# Altium PCB PAN.PcbDoc
Units mm, origin at the board's own origin, x right, y up, seen from the top; angles counter-clockwise.
Board outline 101.6 x 106.5 mm, 2 copper layers (Top Layer, Bottom Layer); 124 components, 83 nets, 373 pads, 405 vias.
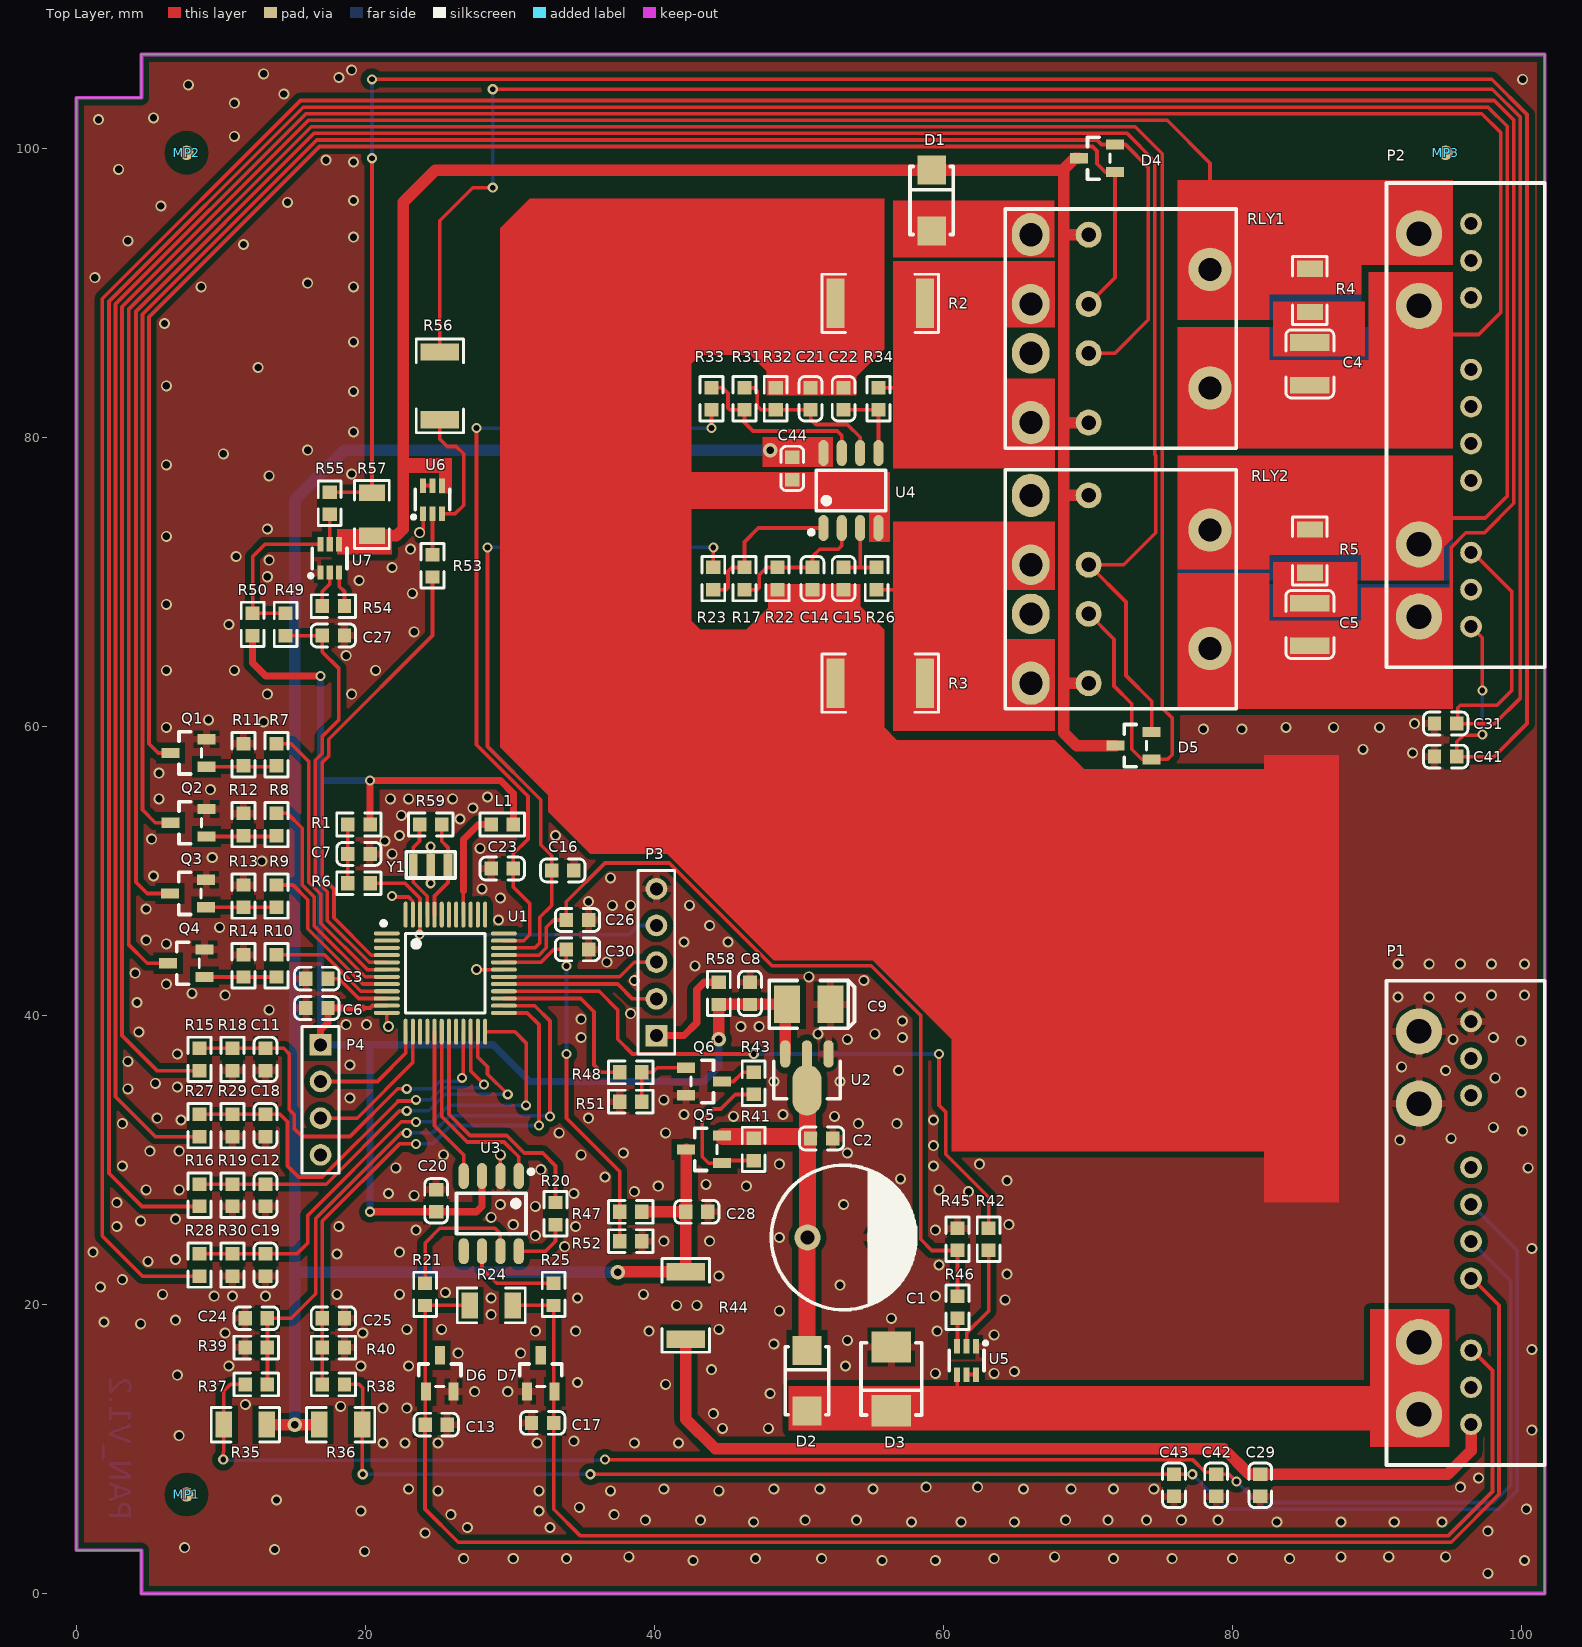
[diagram p0: Top Layer view]
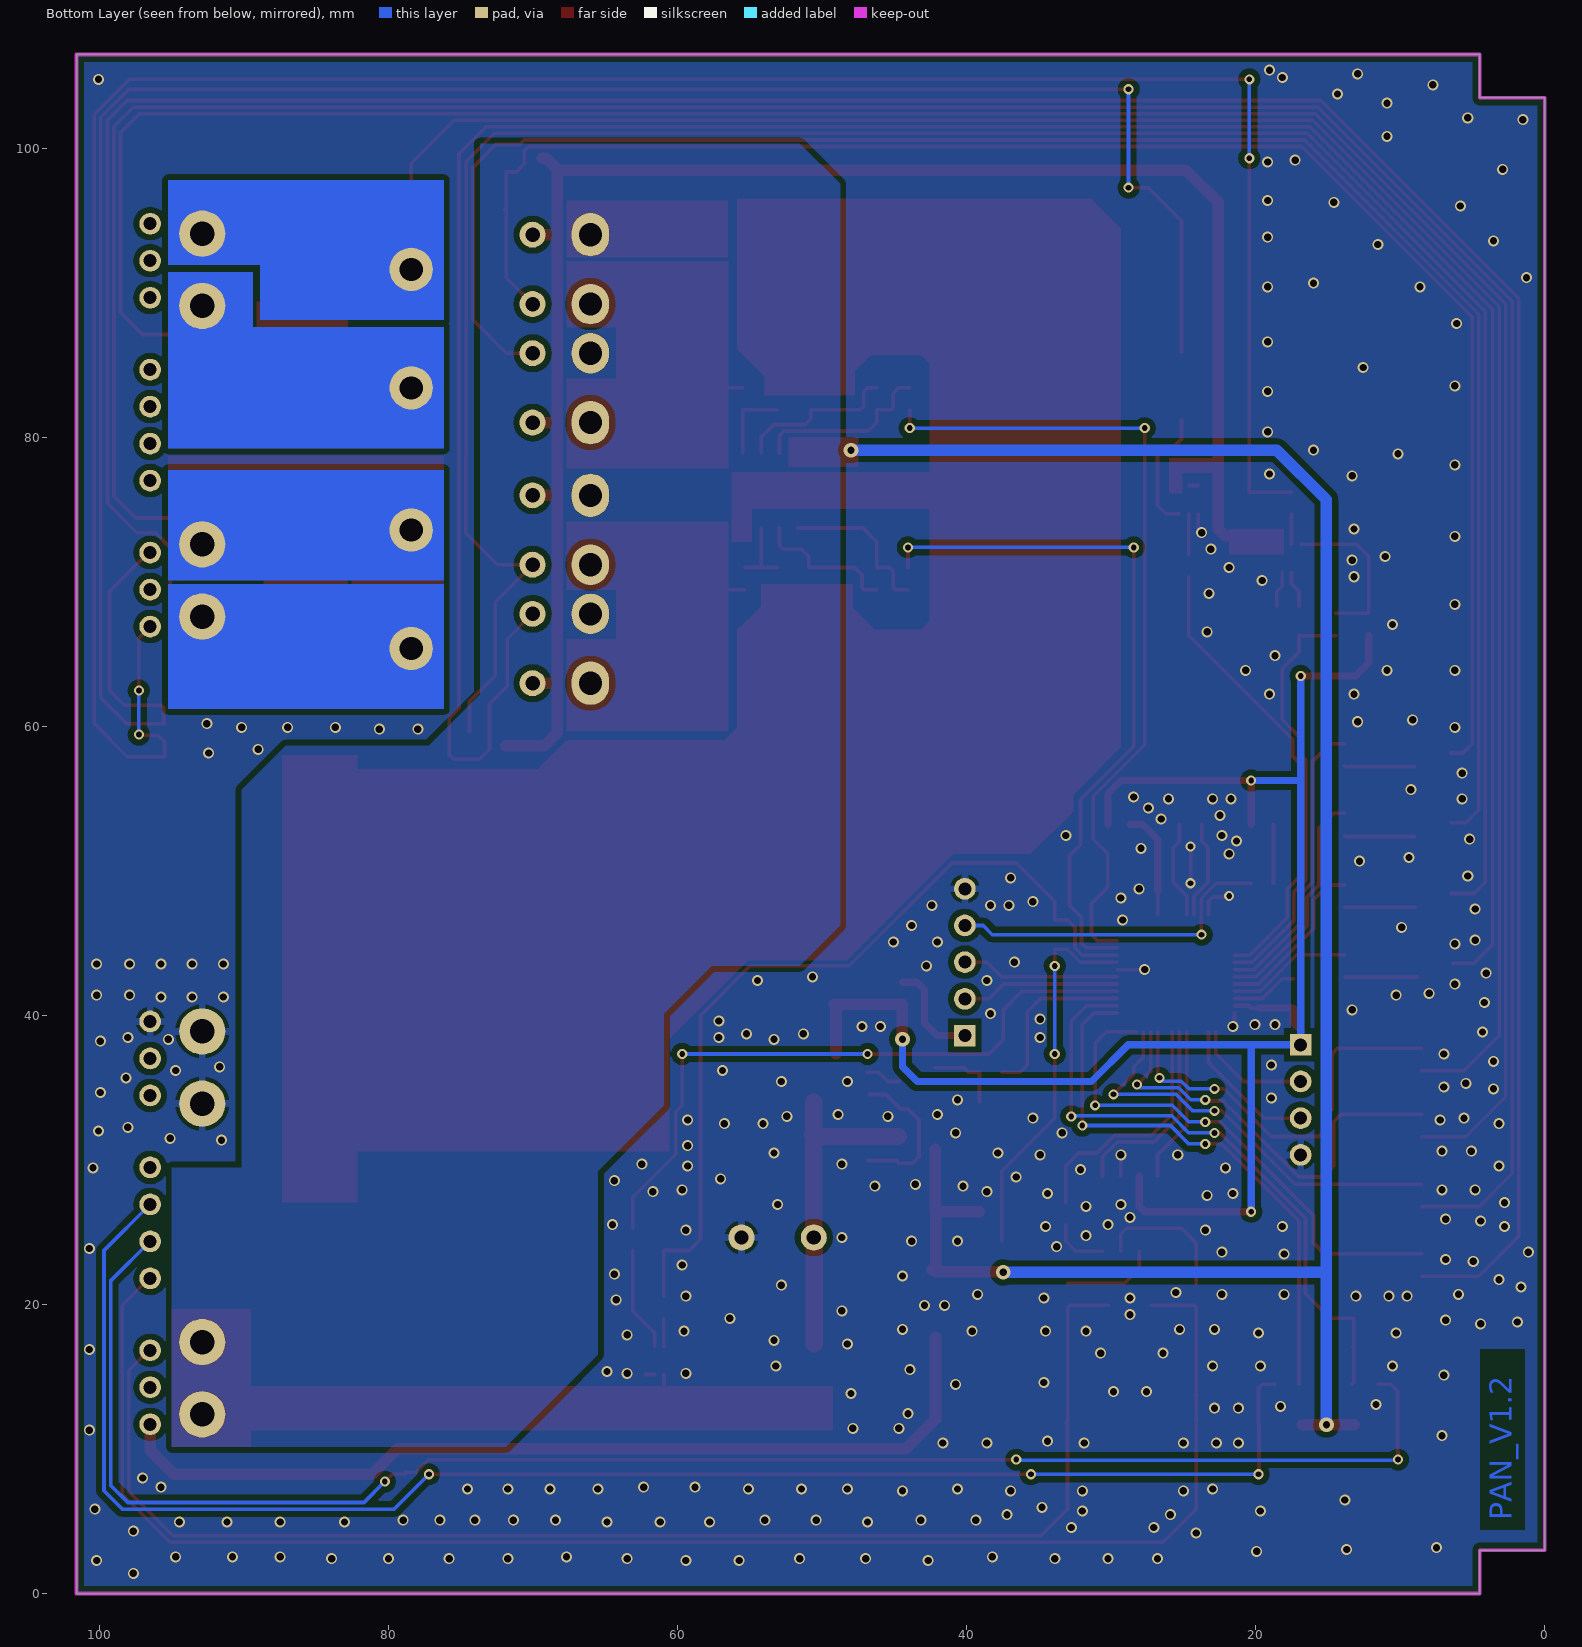
[diagram p1: Bottom Layer view, seen from below]
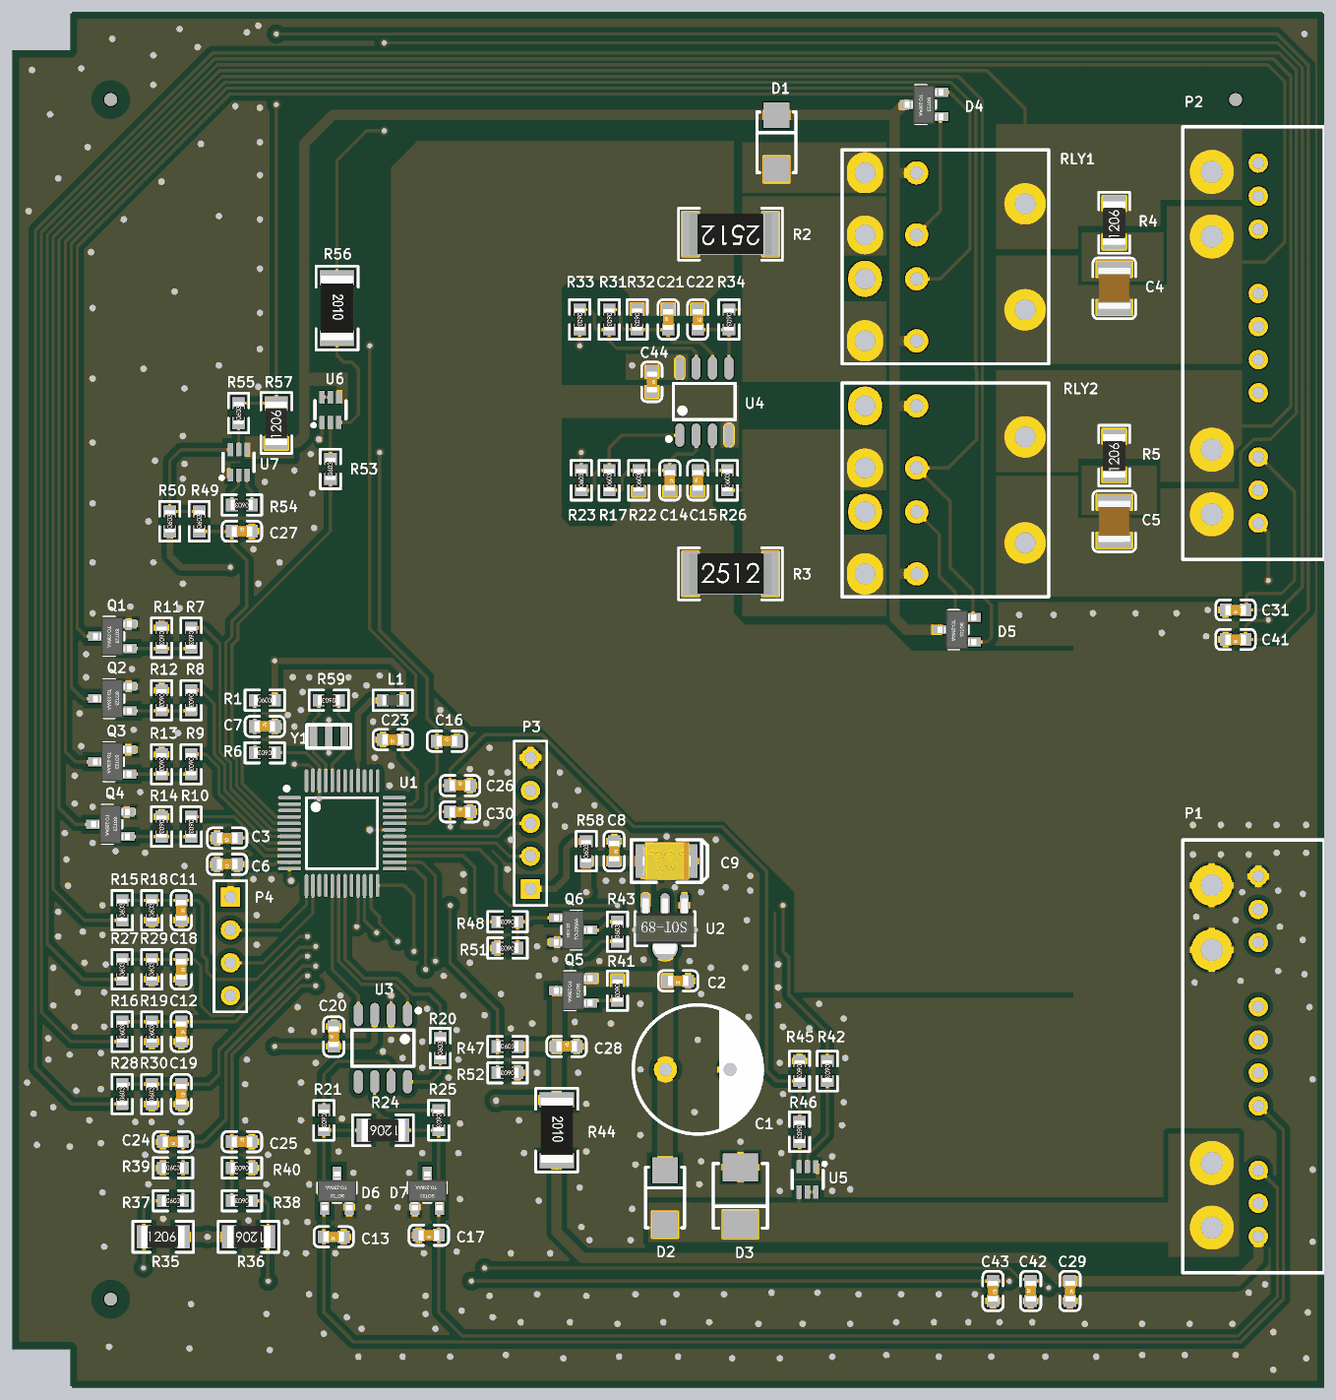
[diagram p2: 3D render of the assembled board from above, using the file's embedded part models]

## Layer stack, top to bottom
Top Layer: signal copper 0.0356
Dielectric: dielectric 0.32, FR-4, Dk 4.8
Bottom Layer: signal copper 0.0356

## Board outline
0,3 0,103.5 4.5,103.5 4.5,106.5 101.6,106.5 101.6,0 4.5,0 4.5,3

## Design rules (kind name [scope] priority, off if disabled: settings)
Clearance Clearance_polygon [InPolygon] p1: gap=0.4
Clearance [All] p2: gap=0.2
HoleSize [All] p1: absolutevalues=TRUE maxlimit=5.5 minlimit=0.4 maxpercent=80.000 minpercent=20.000
HoleToHoleClearance [All] p1: gap=0 allowstackedmicrovias=TRUE
MinimumSolderMaskSliver [All] p1: minsoldermaskwidth=0
PolygonConnect PolygonConnect_via [IsVia] p1: connectstyle=Direct reliefconductorwidth=0.254 reliefentries=4 polygonreliefangle="90 Angle" airgapwidth=0.254
PolygonConnect [InNet('GND')] p2: connectstyle=Relief reliefconductorwidth=0.508 reliefentries=4 polygonreliefangle="90 Angle" airgapwidth=0.254
RoutingVias [All] p1: holewidth=0.4 width=0.7 viastyle="Through Hole" minholewidth=0.4 minwidth=0.7 maxholewidth=3.25 maxwidth=5.25
SilkToSilkClearance [All] p1: silktosilkclearance=0
SilkToSolderMaskClearance [IsPad] p1: minsilkscreentomaskgap=0 clearancetoexposedcopper=TRUE
SolderMaskExpansion [All] p1: expansion=0.102
Width [All] p1: maxlimit=5 minlimit=0.2 preferedwidth=0.254
23 further rules are at their usual default settings.

## Classes and differential pairs
component class MOUDLAR: C1 C2 C4 C5 C8 C9 C11 C12 C13 C14 C15 C16 C17 C18 C19 C20 C21 C22 C23 C24 C25 C26 C27 C28 C29 C30 C31 C41 C42 C43 C44 D1 D2 D3 D4 D5 D6 D7 P1 P2 Q1 Q2 Q3 Q4 Q5 Q6 R2 R3 R4 R5 R7 R8 R9 R10 R11 R12 R13 R14 R15 R16 R17 R18 R19 R20 R21 R22 R23 R24 R25 R26 R27 R28 R29 R30 R31 R32 R33 R34 R35 R36 R37 R38 R39 R40 R41 R42 R43 R44 R45 R46 R47 R48 R49 R50 R51 R52 R53 R54 R55 R56 R57 RLY1 RLY2 U2 U3 U4 U5 U6 U7
component class MCU: C3 C6 C7 L1 MP1 MP2 MP3 P3 P4 R1 R6 R58 R59 U1 Y1

## Components (designator, comment, footprint, x,y, rotation, side; value= is the part's Value field where it differs from the comment)
C1 "220uF/35V" CAP10X12.5 53.086,24.638 r0 top
C2 "100nF" LC-0603_C 51.562,31.496 r180 top
C3 "10uF/10V" LC-0603_C 16.637,42.545 r180 top
C4 "100nF" LC-1210_C 85.344,85.09 r90 top
C5 "100nF" LC-1210_C 85.344,67.056 r90 top
C6 "100nF" LC-0603_C 16.637,40.513 r180 top
C7 "10uF/10V" LC-0603_C 19.55,51.181 r0 top
C8 "100nF" LC-0603_C 46.609,41.529 r270 top
C9 "10uF" LC-CASE-B_3528 50.673,40.767 r0 top
C11 "100nF" LC-0603_C 13.081,36.957 r270 top
C12 "100nF" LC-0603_C 13.081,27.559 r270 top
C13 "100pF" LC-0603_C 24.892,11.684 r180 top
C14 "100nF" LC-0603_C 50.927,70.231 r270 top
C15 "100nF" LC-0603_C 53.086,70.231 r90 top
C16 "100nF" LC-0603_C 33.655,50.038 r0 top
C17 "100pF" LC-0603_C 32.258,11.811 r180 top
C18 "100nF" LC-0603_C 13.081,32.385 r270 top
C19 "100nF" LC-0603_C 13.081,22.733 r270 top
C20 "100nF" LC-0603_C 24.892,27.178 r90 top
C21 "100nF" LC-0603_C 50.8,82.677 r90 top
C22 "100nF" LC-0603_C 53.086,82.677 r270 top
C23 "100nF" LC-0603_C 29.464,50.165 r180 top
C24 "100nF" LC-0603_C 12.446,19.05 r180 top
C25 "100nF" LC-0603_C 17.78,19.05 r0 top
C26 "100nF" LC-0603_C 34.671,46.609 r0 top
C27 "100nF" LC-0603_C 17.78,66.294 r0 top
C28 "100nF" LC-0603_C 42.926,26.416 r0 top
C29 "100nF" LC-0603_C 81.915,7.493 r270 top
C30 "100nF" LC-0603_C 34.671,44.577 r0 top
C31 "100nF" LC-0603_C 94.742,60.198 r180 top
C41 "100nF" LC-0603_C 94.742,57.912 r180 top
C42 "100pF" LC-0603_C 78.867,7.493 r90 top
C43 "100pF" LC-0603_C 75.946,7.493 r270 top
C44 "100nF" LC-0603_C 49.53,77.851 r270 top
D1 "SS24A" LC-SMA(DO-214AC)_S1 59.182,96.393 r270 top
D2 "SS24A" LC-SMA(DO-214AC)_S1 50.546,14.732 r270 top
D3 "SMBJ15CA" LC-SMB(DO-214AA)_S1 56.388,14.859 r90 top
D4 "BAV70" LC-SOT-23(SOT-23-3) 70.612,99.314 r0 top
D5 "BAV70" LC-SOT-23(SOT-23-3) 73.152,58.674 r0 top
D6 "MMBZ27VALT1G" LC-SOT-23(SOT-23-3) 25.146,15.24 r270 top
D7 "MMBZ27VALT1G" LC-SOT-23(SOT-23-3) 32.131,15.24 r270 top
L1 "BLM18PG181SN1D" LC-0603_L 29.464,53.213 r0 top
MP1 "MARK" MARK 7.62,6.858 r0 top
MP2 "MARK" MARK 7.62,99.695 r0 top
MP3 "MARK" MARK 94.742,99.695 r0 top
P1 "PedalConner" PADEL_CON 96.5,25.65 r0 top locked
P2 "PedalConner" PADEL_CON 96.5,80.85 r0 top locked
P3 "ICE" HDR1X5 40.132,38.608 r90 top
P4 "DEBUG" HDR1X4 16.891,37.973 r270 top
Q1 "BC817" LC-SOT-23(SOT-23-3) 7.747,58.165 r0 top
Q2 "BC817" LC-SOT-23(SOT-23-3) 7.747,53.339 r0 top
Q3 "BC817" LC-SOT-23(SOT-23-3) 7.728,48.443 r0 top
Q4 "BC817" LC-SOT-23(SOT-23-3) 7.601,43.617 r0 top
Q5 "BC807" LC-SOT-23(SOT-23-3) 43.434,30.734 r0 top
Q6 "BC817" LC-SOT-23(SOT-23-3) 43.434,35.433 r180 top
R1 "10K" LC-0603_R 19.55,53.213 r0 top
R2 "0.01Ω" LC-2512_R 55.626,89.281 r180 top
R3 "0.01Ω" LC-2512_R 55.626,62.992 r0 top
R4 "10Ω" LC-1206_R 85.344,90.17 r90 top
R5 "10Ω" LC-1206_R 85.344,72.136 r90 top
R6 "100R" LC-0603_R 19.55,49.149 r180 top
R7 "4.7K" LC-0603_R 13.843,58.039 r270 top
R8 "4.7K" LC-0603_R 13.843,53.213 r270 top
R9 "4.7K" LC-0603_R 13.843,48.26 r270 top
R10 "4.7K" LC-0603_R 13.843,43.434 r270 top
R11 "10K" LC-0603_R 11.557,58.039 r270 top
R12 "10K" LC-0603_R 11.557,53.213 r270 top
R13 "10K" LC-0603_R 11.557,48.26 r270 top
R14 "10K" LC-0603_R 11.557,43.434 r270 top
R15 "100K" LC-0603_R 8.509,36.957 r90 top
R16 "100K" LC-0603_R 8.509,27.559 r90 top
R17 "47K" LC-0603_R 46.228,70.231 r90 top
R18 "47K" LC-0603_R 10.795,36.957 r90 top
R19 "47K" LC-0603_R 10.795,27.559 r90 top
R20 "0" LC-0603_R 33.147,26.289 r90 top
R21 "0" LC-0603_R 24.13,20.701 r270 top
R22 "4.7K" LC-0603_R 48.514,70.231 r90 top
R23 "10K" LC-0603_R 44.069,70.231 r90 top
R24 "120Ω" LC-1206_R 28.702,19.939 r180 top
R25 "0" LC-0603_R 33.02,20.701 r270 top
R26 "2K" LC-0603_R 55.372,70.231 r90 top
R27 "100K" LC-0603_R 8.509,32.385 r90 top
R28 "100K" LC-0603_R 8.509,22.733 r90 top
R29 "47K" LC-0603_R 10.795,32.385 r90 top
R30 "47K" LC-0603_R 10.795,22.733 r90 top
R31 "47K" LC-0603_R 46.228,82.677 r270 top
R32 "4.7K" LC-0603_R 48.387,82.677 r270 top
R33 "10K" LC-0603_R 43.942,82.677 r270 top
R34 "2K" LC-0603_R 55.499,82.677 r270 top
R35 "1.2K" LC-1206_R 11.684,11.684 r0 top
R36 "1.2K" LC-1206_R 18.288,11.684 r180 top
R37 "47K" LC-0603_R 12.446,14.478 r0 top
R38 "47K" LC-0603_R 17.78,14.478 r180 top
R39 "33K" LC-0603_R 12.446,17.018 r0 top
R40 "33K" LC-0603_R 17.78,17.018 r180 top
R41 "10K" LC-0603_R 46.863,30.734 r270 top
R42 "10K" LC-0603_R 63.119,24.511 r270 top
R43 "10K" LC-0603_R 46.863,35.306 r90 top
R44 "100Ω" LC-2010_R 42.164,19.939 r270 top
R45 "10K" LC-0603_R 60.96,24.511 r270 top
R46 "33K" LC-0603_R 60.96,19.812 r270 top
R47 "47K" LC-0603_R 38.354,26.416 r0 top
R48 "10K" LC-0603_R 38.354,36.068 r180 top
R49 "47K" LC-0603_R 14.478,67.056 r90 top
R50 "10K" LC-0603_R 12.192,67.056 r90 top
R51 "10K" LC-0603_R 38.354,34.036 r180 top
R52 "33K" LC-0603_R 38.354,24.384 r180 top
R53 "10K" LC-0603_R 24.638,71.112 r90 top
R54 "10K" LC-0603_R 17.78,68.326 r180 top
R55 "10K" LC-0603_R 17.526,75.438 r90 top
R56 "100Ω" LC-2010_R 25.146,83.566 r270 top
R57 "1.2K" LC-1206_R 20.447,74.676 r90 top
R58 "NC" LC-0603_R 44.45,41.529 r90 top
R59 "1M" LC-0603_R 24.511,53.213 r180 top
RLY1 "JQC-16F-12VDC" HFKA 66.04,81.026 r0 top
RLY2 "JQC-16F-12VDC" HFKA 66.04,62.992 r0 top
U1 "NUC131LC2AE" LC-LQFP-48_7x7x05P 25.527,42.926 r270 top
U2 "HT7550-1" LC-SOT-89(SOT-89-3) 50.546,37.338 r90 top
U3 "TJA1042T" LC-SOIC-8_150mil 28.702,26.289 r180 top
U4 "LM2904DR" LC-SOIC-8_150mil 53.594,76.327 r0 top
U5 "PUMD3" LC-SOT-363 61.595,16.129 r90 top
U6 "PUMD3" LC-SOT-363 24.638,75.692 r270 top
U7 "PUMD3" LC-SOT-363 17.526,71.628 r270 top
Y1 "CSTCE12M0G15C99-R0" SMD_8M_3 24.511,50.419 r0 top

## Footprints (in the part's own frame and the unit in brackets; to place one, negate y for a bottom-side part, rotate by r counter-clockwise, add the part's x,y. Pads: shape width x height; smd on the part's side, far side on the other; paste and mask are expansions set on the pad)
CAP10X12.5 [mm]
  round 1.8 hole 1: 1(-2.5,0) 2(2.5,0)
  silkscreen extent -5,-5 5.08,5
HDR1X4 [mm] "Connector; Header; 4 Position"
  rect 1.5x1.5 hole 0.9: 1(0,0)
  round 1.5 hole 0.9: 2(2.54,0) 3(5.08,0) 4(7.62,0)
  silkscreen extent -1.27,-1.27 8.89,1.27
HDR1X5 [mm] "Connector; Header; 5 Position"
  rect 1.5x1.5 hole 0.9: 1(0,0)
  round 1.5 hole 0.9: 2(2.54,0) 3(5.08,0) 4(7.62,0) 5(10.16,0)
  silkscreen extent -1.27,-1.27 11.43,1.27
HFKA [mm]
  round 1.8 hole 1: 1(4,13) 2(4,8.2) 6(4,0) 7(4,4.8)
  oval 2.6x3 hole 1.6: 3(0,13) 9(0,0)
  oval 2.6x2.8 hole 1.6: 4(0,8.2) 8(0,4.8)
  round 3 hole 1.6: 5(12.4,10.6) 10(12.4,2.4)
  silkscreen extent -1.78,-1.78 14.22,14.78
LC-0603_C [mm]
  rect 0.93x0.98 smd: 1(-0.77,0) 2(0.77,0)
  silkscreen extent -1.54,-0.79 1.54,0.79, body extent -0.8,-0.4 0.8,0.4, height 0.3
LC-0603_L [mm]
  rect 0.93x0.98 smd: 1(-0.77,0) 2(0.77,0)
  silkscreen extent -1.53,-0.79 1.54,0.79, body extent -0.82,-0.41 0.83,0.41, height 0.46
LC-0603_R [mm]
  rect 0.93x0.98 smd: 1(-0.77,0) 2(0.77,0)
  silkscreen extent -1.53,-0.79 1.54,0.79, body extent -0.85,-0.4 0.85,0.4, height 0.56
LC-1206_R [mm]
  rect 1.13x1.8 smd: 1(-1.49,0) 2(1.49,0)
  silkscreen extent -2.35,-1.2 2.35,1.2, body extent -1.7,-0.86 1.65,0.87, height 0.85
LC-1210_C [mm]
  rect 1.16x2.72 smd: 1(-1.475,0) 2(1.475,0)
  silkscreen extent -2.36,-1.66 2.35,1.66, body extent -1.6,-1.25 1.6,1.25, height 1.3
LC-2010_R [mm]
  rect 1.2x2.67 smd: 1(-2.34,0) 2(2.34,0)
  silkscreen extent -3.24,-1.63 3.24,1.63, body extent -2.5,-1.25 2.5,1.25, height 0.6
LC-2512_R [mm]
  rect 1.25x3.42 smd: 1(-3.1,0) 2(3.1,0)
  silkscreen extent -4.02,-2.01 4.02,2.01, body extent -3.16,-1.6 3.16,1.6, height 0.62
LC-CASE-B_3528 [mm]
  rect 1.8x2.6 smd: 1(1.5,0) 2(-1.5,0)
  silkscreen extent -2.73,-1.65 3.16,1.65, body extent -1.85,-1.47 1.85,1.46, height 2.03
LC-LQFP-48_7x7x05P [mm]
  oval 0.28x1.8 smd mask+0.051: 1(-2.75,-4.05) 2(-2.25,-4.05) 3(-1.75,-4.05) 4(-1.25,-4.05) 5(-0.75,-4.05) 6(-0.25,-4.05) 7(0.25,-4.05) 8(0.75,-4.05) 9(1.25,-4.05) 10(1.75,-4.05) 11(2.25,-4.05) 12(2.75,-4.05) 25(2.75,4.05) 26(2.25,4.05) 27(1.75,4.05) 28(1.25,4.05) 29(0.75,4.05) 30(0.25,4.05) 31(-0.25,4.05) 32(-0.75,4.05) 33(-1.25,4.05) 34(-1.75,4.05) 35(-2.25,4.05) 36(-2.75,4.05)
  oval 1.8x0.28 smd mask+0.051: 13(4.05,-2.75) 14(4.05,-2.25) 15(4.05,-1.75) 16(4.05,-1.25) 17(4.05,-0.75) 18(4.05,-0.25) 19(4.05,0.25) 20(4.05,0.75) 21(4.05,1.25) 22(4.05,1.75) 23(4.05,2.25) 24(4.05,2.75) 37(-4.05,2.75) 38(-4.05,2.25) 39(-4.05,1.75) 40(-4.05,1.25) 41(-4.05,0.75) 42(-4.05,0.25) 43(-4.05,-0.25) 44(-4.05,-0.75) 45(-4.05,-1.25) 46(-4.05,-1.75) 47(-4.05,-2.25) 48(-4.05,-2.75)
  silkscreen extent -3.6,-4.42 2.75,2.75
LC-SMA(DO-214AC)_S1 [mm]
  rect 2x2 smd: 1(2.1,0) 2(-2.1,0)
  silkscreen extent -2.35,-1.5 2.35,1.5
LC-SMB(DO-214AA)_S1 [mm]
  rect 2.159x2.743 smd: 1(2.21,0) 2(-2.21,0)
  silkscreen extent -2.5,-2.1 2.5,2.1
LC-SOIC-8_150mil [mm]
  oval 0.7x1.8 smd: 1(-1.905,-2.6) 2(-0.635,-2.6) 3(0.635,-2.6) 4(1.905,-2.6) 5(1.905,2.6) 6(0.635,2.6) 7(-0.635,2.6) 8(-1.905,2.6)
  silkscreen extent -2.9,-3.05 2.4,1.4
LC-SOT-23(SOT-23-3) [mm]
  rect 1.25x0.7 smd: 1(1.25,-0.95) 2(1.25,0.95) 3(-1.25,0)
  silkscreen extent -0.65,-1.46 0.9,1.46, body extent -1.5,-1.5 1.5,1.5, height 1.3
LC-SOT-89(SOT-89-3) [mm]
  oval 1.9x0.7 smd: 1(0,-1.5) 3(0,1.5)
  oval 3.5x2 smd: 2(-2.5,0)
  oval 2.1x0.7 smd: 2(-0.1,0)
  silkscreen extent -3.1,-2.3 -0.5,2.3, body extent -3.75,-2.25 0.55,2.25, height 1.51
LC-SOT-363 [mm]
  rect 1x0.42 smd mask+0.051: 1(0.975,-0.65) 2(0.975,0) 3(0.975,0.65) 4(-0.975,0.65) 5(-0.975,0) 6(-0.975,-0.65)
  silkscreen extent -0.7,-1.43 1.32,1.2
MARK [mm]
  round 1 smd: MARK(0,0)
  Top Layer pour cut-out: 0,-1.5 -0.574,-1.386 -1.061,-1.061 -1.386,-0.574 -1.5,0 -1.5,0 -1.386,0.574 -1.061,1.061 -0.574,1.386 0,1.5 0,1.5 0.574,1.386 1.061,1.061 1.386,0.574 1.5,0 1.5,0 1.386,-0.574 1.061,-1.061 0.574,-1.386 0,-1.5
PADEL_CON [mm]
  round 3.2 hole 1.7: 1(-3.6,13.25) 2(-3.6,8.25) 3(-3.6,-8.25) 4(-3.6,-13.25)
  round 1.5 hole 0.9: 5(0,-13.935) 6(0,-11.375) 7(0,-8.815) 8(0,-3.84) 9(0,-1.28) 10(0,1.28) 11(0,3.84) 12(0,8.815) 13(0,11.375) 14(0,13.935)
  silkscreen extent -5.85,-16.75 5.11,16.75
SMD_8M_3 [mm]
  rect 0.6x1.5 smd: 1(-1.2,0) 2(1.2,0) 3(0,0)
  silkscreen extent -1.7,-0.9 1.7,0.9

## Part data
C1: library part "Cap Pol1", "Polarized Capacitor (Radial)"
C2 C3 C4 C5 C6 C7 C8 C9 C11 C12 C13 C14 C15 C16 C17 C18 C19 C20 C21 C22 C23 C24 C25 C26 C27 C28 C29 C30 C31 C41 C42 C43 C44: library part "0805 6pF (6R0) 0.25pF 50V", "贴片电容"
D1 D2: library part "SMA(DO-214AC) SS54", "二极管"
D3: library part "SMB/DO-214AA P6SMB6.8CA", "TVS"
D4 D5 D6 D7: library part "SOT-23 BAV70 A4", "开关二极管"
L1: library part Inductor, "Inductor"
P3: library part "Header 5", "Header, 5-Pin"
P4: library part "Header 4", "Header, 4-Pin"
Q1 Q2 Q3 Q4 Q6: library part "SOT-23 SS8050 Y1", "三极管"
Q5: library part "SOT-23 SS8550 Y2", "三极管"
R1 R2 R3 R4 R5 R6 R7 R8 R9 R10 R11 R12 R13 R14 R15 R16 R17 R18 R19 R20 R21 R22 R23 R24 R25 R26 R27 R28 R29 R30 R31 R32 R33 R34 R35 R36 R37 R38 R39 R40 R41 R42 R43 R44 R45 R46 R47 R48 R49 R50 R51 R52 R53 R54 R55 R56 R57 R58 R59: library part "0805 15KΩ (1502) 1%", "贴片电阻"
U2: library part "SOT-89 78L05G-AB3-R", "低压差线性稳压(LDO)"
U3: library part TJA1042
U4: library part LM2904DR2G, "运放"
Y1: library part CSTC

## Via types
v1: diameter 0.762, hole 0.508, Top Layer to Bottom Layer, tented both sides, 362 vias
v2: diameter 0.7, hole 0.4, Top Layer to Bottom Layer, tented both sides, 39 vias
v3: diameter 1.016, hole 0.508, Top Layer to Bottom Layer, tented both sides, 4 vias

## Nets (pads, with @x,y where several pads share a name; then routed paths per layer and width w, separated by ;. In a path a pad name is that pad's centre, name@x,y a point inside that pad or via, vN(x,y) a via of type N, cw(c..) or ccw(c..) an arc to the next point about the centre after c; other vN are vias at no path point)
ADC_L_OUT: C23.1 R33.2 U1.35 | length 56.9
  Top Layer w0.254: v2(27.686,80.645) 27.686,58.728 31.242,55.172 31.242,52.197 30.234,51.189 C23.1 30.234,48.887 31.369,47.752 31.369,45.593 30.952,45.176 U1.35 ; v2(43.942,80.645) R33.2
  Bottom Layer w0.254: v2(27.686,80.645) v2(43.942,80.645)
ADC_R_OUT: C16.1 R23.2 U1.34 | length 49.4
  Top Layer w0.254: v2(28.448,72.39) 28.448,58.608 32.131,54.925 32.131,51.816 32.885,51.062 C16.1 32.885,47.617 32.058,46.79 32.058,45.012 31.722,44.676 U1.34 ; R23.2 v2(44.069,72.39)
  Bottom Layer w0.254: v2(28.448,72.39) 43.942,72.39 44.069,72.517 v2(44.069,72.39)
AVDD5: L1.1 U1.40 | length 7.5
  Top Layer w0.254: U1.40 26.777,48.621
  Top Layer w0.5: 26.777,48.621 26.777,52.177 27.813,53.213 L1.1
CANH: C13.2 D6.1 P1.8 R21.2 R24.2 | length 109.5
  Top Layer w0.254: C13.2 24.122,5.85 26.416,3.556 95.123,3.556 98.436,6.869 98.436,19.953 P1.8@96.494,21.895 ; C13.2@24.13,11.81 D6.1@24.13,13.782 ; D6.1@24.196,13.716 D6.1@24.13,13.782 ; R24.2 24.258,19.939 24.13,19.811 D6.1@24.13,13.782
CANL: C17.1 D7.2 P1.7 R24.1 R25.2 | length 94.4
  Top Layer w0.254: R24.1 32.892,19.939 33.02,19.811 33.02,11.939 C17.1@33.148,11.811 ; C17.1 33.028,5.834 34.852,4.01 94.935,4.01 97.982,7.057 97.982,15.432 P1.7@96.494,16.92
CANRX: U1.17 U3.4 | length 10.8
  Top Layer w0.254: U1.17 24.777,32.373 26.797,30.353 U3.4
CANSTBY: R20.2 U1.19 | length 17.1
  Top Layer w0.254: U1.19 25.777,33.158 27.239,31.696 29.779,31.696 30.995,30.48 32.258,30.48 33.147,29.591 R20.2
CANTX: U1.18 U3.1 | length 13.7
  Top Layer w0.254: U1.18 25.277,33.016 27.051,31.242 29.591,31.242 30.607,30.226 U3.1
DVDD5: C6.1 C8.2 C9.2 C20.1 L1.2 P4.1 R1.2 R50.1 R58.1 U1.11 U2.3 U3.3 | length 121.4
  Top Layer w0.3: 19.812,40.513 20.32,40.513 20.483,40.676 U1.11 U1.11@21.467,40.666
  Top Layer w0.5: R50.1 12.192,64.389 13.081,63.5 v2(16.891,63.5) ; P4.1 16.891,38.989 17.407,39.505 C6.1 19.812,40.513 ; v2(20.32,26.416) 27.686,26.416 28.067,26.797 U3.3 ; R1.2 v2(20.32,56.261) 29.337,56.261 30.234,55.364 L1.2
  Top Layer w0.8: v3(44.45,38.354) R58.1 44.458,40.767 C9.2 49.046,40.64 U2.3
  Bottom Layer w0.5: v2(16.891,63.5) 16.891,56.261 ; v2(20.32,26.416) 20.32,37.973 ; v2(20.32,56.261) 16.891,56.261 ; v3(44.45,38.354) 44.45,36.449 43.434,35.433 31.369,35.433 28.829,37.973 20.32,37.973 ; 16.891,56.261 P4.1 20.32,37.973
GND: C1.2 C2.1 C3.2 C6.2 C7.2 C8.1 C9.1 C11.2 C12.2 C13.1 C14.2 C15.1 C16.2 C17.2 C18.2 C19.2 C20.2 C21.2 C22.1 C23.2 C24.2 C25.2 C26.2 C27.2 C28.2 C29.2 C30.2 C31.2 C41.2 C42.1 C43.2 C44.2 D3.1 D6.2 D7.1 P1.1 P1.2 P1.14 P3.5 P4.4 Q1.2 Q2.2 Q3.2 Q4.2 Q6.2 R2.2 R3.1 R11.1 R12.1 R13.1 R14.1 R18.1 R19.1 R22.1 R29.1 R30.1 R32.1 R39.1 R40.1 R45.1 R51.2 R52.1 U1.12 U1.31 U1.47 U2.1 U3.2 U4.4 U5.1 U6.1 U7.1 Y1.3 | length 11
  Top Layer w0.254: U1.12 21.477,39.356 v1(21.59,39.243) ; v2(21.844,48.26) 21.901,48.203 22.97,48.203 23.277,47.896 U1.47 ; v1@23.876,73.152 23.988,73.264 U6.1 ; v2(24.511,49.149) Y1.3 v2(24.511,51.689) ; v1(27.686,43.18) 27.69,43.176 U1.31 ; U3.2 v1(29.337,30.353)
  other v1: 97.663,1.397 42.672,2.286 55.753,2.286 59.436,2.286 100.203,2.286 26.797,2.413 30.226,2.413 33.909,2.413 46.99,2.413 51.562,2.413 63.5,2.413 71.755,2.413 75.819,2.413 80.01,2.413 83.947,2.413 38.227,2.54 67.691,2.54 87.503,2.54 90.805,2.54 94.742,2.54 19.939,2.921 13.716,3.048 7.493,3.175 24.13,4.191 97.663,4.318 27.051,4.572 32.766,4.572 46.863,4.953 57.785,4.953 61.214,4.953 64.897,4.953 83.058,4.953 87.503,4.953 91.186,4.953 94.488,4.953 39.37,5.08 43.18,5.08 50.419,5.08 53.975,5.08 68.453,5.08 71.374,5.08 74.041,5.08 76.454,5.08 78.994,5.08 25.908,5.461 37.211,5.461 19.685,5.715 32.004,5.715 100.33,5.842 34.798,5.969 13.843,6.477 25.019,7.112 32.004,7.112 36.957,7.112 44.45,7.112 22.987,7.239 40.64,7.239 48.26,7.239 51.435,7.239 55.118,7.239 65.532,7.239 68.834,7.239 71.755,7.239 74.549,7.239 58.801,7.366 62.357,7.366 95.758,7.366 97.028,8.001 21.209,10.414 22.733,10.414 25.019,10.414 31.877,10.414 38.608,10.414 41.656,10.414 34.417,10.541 7.112,10.922 100.711,11.303 44.704,11.43 47.879,11.43 44.069,12.446 21.209,12.827 22.86,12.827 18.288,12.954 11.684,13.081 48.006,13.843 27.559,13.97 29.845,13.97 40.767,14.478 34.671,14.605 6.985,15.113 59.436,15.24 63.5,15.24 64.897,15.367 43.942,15.494 10.541,15.748 19.685,15.748 22.987,15.748 53.213,15.748 26.416,16.637 30.734,16.637 100.711,16.891 48.26,17.272 53.34,17.526 63.5,17.907 10.287,18.034 19.812,18.034 31.75,18.161 34.544,18.161 39.624,18.161 59.563,18.161 22.86,18.288 25.273,18.288 44.45,18.288 4.445,18.669 1.905,18.796 6.858,18.923 56.388,19.05 28.702,19.304 48.641,19.558 41.529,19.939 42.926,19.939 64.262,20.32 28.702,20.447 34.671,20.447 9.525,20.574 10.795,20.574 13.081,20.574 59.436,20.574 5.969,20.701 18.034,20.701 22.352,20.701 39.243,20.701 25.527,20.828 1.651,21.209 52.832,21.336 3.175,21.717 44.45,21.971 64.389,22.098 59.69,22.733 4.953,22.987 6.858,23.114 18.034,23.495 1.143,23.622 22.352,23.622 100.711,23.876 33.782,24.003 40.64,24.384 43.815,24.384 48.641,24.638 31.75,24.765 23.495,25.146 59.436,25.146 2.794,25.4 18.161,25.4 34.544,25.4 30.226,25.527 64.516,25.527 4.445,25.781 6.858,25.908 28.702,26.035 31.75,26.797 29.337,26.924 53.086,26.924 2.794,27.051 23.368,27.559 21.59,27.686 34.417,27.686 38.608,27.813 61.722,27.813 4.826,27.94 7.112,27.94 59.69,27.94 40.259,28.194 46.355,28.194 43.561,28.321 64.389,28.575 57.023,28.702 36.576,28.829 32.131,29.337 22.098,29.464 100.457,29.464 3.175,29.591 59.309,29.591 48.641,29.718 62.484,29.718 25.4,30.353 34.925,30.353 37.846,30.48 53.34,30.48 5.08,30.607 7.112,30.607 59.309,30.988 91.567,31.369 95.123,31.496 33.401,31.877 40.767,31.877 100.076,32.004 98.044,32.258 3.175,32.512 54.102,32.512 56.769,32.512 7.239,32.766 59.309,32.766 5.588,32.893 35.433,32.893 45.466,33.02 52.451,33.02 42.037,33.147 48.895,33.147 40.64,34.163 18.923,34.29 99.949,34.671 3.556,34.925 6.985,35.052 5.461,35.306 48.26,35.433 52.832,35.433 98.171,35.687 56.896,36.195 94.742,36.195 91.694,36.449 18.923,36.576 3.556,36.83 6.985,37.338 99.949,38.227 53.34,38.354 95.25,38.354 34.925,38.481 57.15,38.481 98.044,38.481 51.308,38.735 55.245,38.735 4.318,38.862 45.974,39.243 47.244,39.243 18.669,39.37 20.066,39.37 57.15,39.624 34.925,39.751 38.354,40.132 13.335,40.386 4.191,40.894 91.44,41.275 93.599,41.275 95.758,41.275 10.287,41.402 97.917,41.402 100.203,41.402 8.001,41.529 6.223,42.164 38.608,42.418 54.483,42.418 50.673,42.672 4.064,42.926 42.799,43.434 91.44,43.561 93.599,43.561 95.758,43.561 97.917,43.561 100.203,43.561 36.703,43.688 6.223,44.958 42.037,45.085 45.085,45.085 4.826,45.212 9.906,46.101 43.815,46.228 29.21,46.609 4.826,47.371 37.084,47.625 38.354,47.625 42.418,47.625 35.433,47.879 29.337,48.133 28.067,48.768 36.957,49.53 5.334,49.657 12.827,50.673 9.398,50.927 21.844,51.181 27.94,51.562 21.336,52.07 5.207,52.197 22.352,52.451 33.147,52.451 26.543,53.594 22.479,53.848 27.432,54.356 5.715,54.991 21.717,54.991 22.987,54.991 26.035,54.991 28.448,55.118 9.271,55.626 5.715,56.769 92.456,58.166 89.027,58.42 77.978,59.817 80.645,59.817 6.223,59.944 83.693,59.944 86.995,59.944 90.17,59.944 92.583,60.198 12.954,60.325 9.144,60.452 13.208,62.23 19.05,62.23 6.223,63.881 10.922,63.881 20.701,63.881 18.669,64.897 23.368,66.548 10.541,67.056 6.223,68.453 23.241,69.215 19.558,70.104 13.208,70.358 21.844,70.993 13.335,71.501 11.049,71.755 23.114,72.263 6.223,73.152 23.749,73.406 13.208,73.66 13.335,77.343 19.05,77.47 6.223,78.105 10.16,78.867 16.002,79.121 19.177,80.391 19.177,83.185 6.223,83.566 12.573,84.836 19.177,86.614 6.096,87.884 8.636,90.424 19.177,90.424 16.002,90.678 1.27,91.059 11.557,93.345 3.556,93.599 19.177,93.853 5.842,96.012 14.605,96.266 19.177,96.393 2.921,98.552 19.177,99.06 17.272,99.187 10.922,100.838 1.524,101.981 5.334,102.108 10.922,103.124 14.351,103.759 7.747,104.394 100.076,104.775 18.161,104.902 12.954,105.156 19.05,105.41
ICSPCLK: P3.3 U1.30 | length 11
  Top Layer w0.254: U1.30 37.592,42.676 38.604,43.688 P3.3
ICSPDAT: P3.2 U1.29 | length 11
  Top Layer w0.254: U1.29 37.453,42.176 38.481,41.148 P3.2
KT_L_H: R2.1 R34.1 RLY1.4 RLY1.9 | length 2.6
  Top Layer w0.254: R34.1 57.904,83.447 58.039,83.312
KT_R_H: R3.2 R26.1 RLY2.4 RLY2.9 | length 2.3
  Top Layer w0.254: R26.1 57.539,69.461 57.658,69.342
LIN1: C27.1 R49.1 U1.5 | length 29.1
  Top Layer w0.254: R49.1 17.002,66.286 C27.1 17.01,65.159 18.161,64.008 18.161,60.459 17.01,59.308 17.01,58.135 16.533,57.658 16.533,49.402 17.364,48.57 17.364,46.574 20.262,43.676 U1.5
LIN1_IN: C41.1 P2.5 R55.2 R57.2 | length 171.2
  Top Layer w0.254: R55.2 R57.2@20.447,76.208 ; R57.2 R57.2@20.447,76.208 ; v2(20.447,99.314) R57.2@20.447,76.208 ; v2(20.447,104.775) 97.931,104.775 100.368,102.338 100.368,60.198 98.082,57.912 C41.1 95.512,58.936 95.957,59.381 97.227,59.381 v2(97.282,59.436) ; P2.5 97.282,66.133 v2(97.282,62.484)
  Bottom Layer w0.254: v2(20.447,99.314) v2(20.447,104.775) ; v2(97.282,59.436) v2(97.282,62.484)
LIN2: R53.1 U1.4 | length 31.8
  Top Layer w0.254: U1.4 20.404,44.176 17.818,46.762 17.818,48.758 17.018,49.558 17.018,57.501 17.464,57.947 17.464,59.12 24.638,66.294 R53.1
LIN2_IN: C31.1 P2.7 R56.1 | length 154
  Top Layer w0.254: R56.1 25.146,94.996 27.432,97.282 v2(28.804,97.282) 28.854,97.282 v2@28.829,97.257 ; v2(28.804,104.089) 97.975,104.089 99.914,102.15 99.914,61.976 98.136,60.198 C31.1 95.577,60.263 95.577,61.287 95.758,61.468 98.298,61.468 99.314,62.484 99.314,69.342 96.621,72.035 P2.7
  Bottom Layer w0.254: v2(28.804,97.282) v2(28.804,104.089)
MOTOR_L_C1: P2.1 R4.2 R15.1 RLY1.5 | length 146
  Top Layer w0.254: R15.1@8.501,36.195 R15.1 5.577,36.187 3.156,38.608 3.156,89.036 16.066,101.946 75.473,101.946 78.44,98.979 RLY1.5
MOTOR_L_C2: C4.1 P2.2 R27.1 RLY1.10 | length 181
  Top Layer w0.254: R27.1 5.469,31.615 2.702,34.382 2.702,89.224 15.878,102.4 97.244,102.4 98.552,101.092 98.552,88.646 97.028,87.122 94.234,87.122
MOTOR_R_C1: P2.3 R5.2 R16.1 RLY2.5 | length 200.9
  Top Layer w0.254: R16.1 4.542,26.789 2.248,29.083 2.248,89.412 15.69,102.854 97.679,102.854 99.006,101.527 99.006,75.946 97.482,74.422 94.742,74.422
MOTOR_R_C2: C5.1 P2.4 R28.1 RLY2.10 | length 211.8
  Top Layer w0.254: R28.1 4.58,21.963 1.794,24.749 1.794,89.6 15.502,103.308 98.114,103.308 99.46,101.962 99.46,75.438 97.428,73.406 96.139,73.406 95.123,72.39 95.123,69.342
NetC4_2: C4.2 R4.1
NetC5_2: C5.2 R5.1
NetC7_1: C7.1 R1.1 R6.2 | length 4.1
  Top Layer w0.254: R6.2 R1.1
NetC14_1: C14.1 R17.1 R22.2 U4.2 | length 10.2
  Top Layer w0.254: R17.1 47.109,69.461 47.244,69.596 47.244,70.485 47.76,71.001 R22.2 C14.1 50.927,71.755 51.435,72.263 52.705,72.263 52.959,72.517 U4.2
NetC15_2: C15.2 R26.2 U4.3 | length 5
  Top Layer w0.254: C15.2 54.229,71.001 ; U4.3 54.229,71.001 ; R26.2 54.229,71.001
NetC21_1: C21.1 R31.1 R32.2 U4.6 | length 11.5
  Top Layer w0.254: R31.1 46.855,83.447 47.117,83.185 47.117,82.169 47.371,81.915 48.379,81.915 R32.2 C21.1 50.8,81.28 51.181,80.899 53.34,80.899 54.229,80.01 U4.6
NetC22_2: C22.2 R34.2 U4.5 | length 5.4
  Top Layer w0.254: C22.2 R34.2 U4.5
NetP3_1: P3.1 R58.2 | length 7.2
  Top Layer w0.5: P3.1 42.037,38.608 42.926,39.497 42.926,41.783 43.442,42.299 R58.2
NetQ1_1: Q1.1 R7.2 R11.2 | length 4.9
  Top Layer w0.254: Q1.1 13.789,57.215 R7.2
NetQ2_1: Q2.1 R8.2 R12.2 | length 4.9
  Top Layer w0.254: Q2.1 13.789,52.389 R8.2
NetQ3_1: Q3.1 R9.2 R13.2 | length 4.9
  Top Layer w0.254: Q3.1 13.84,47.493 R9.2
NetQ4_1: Q4.1 R10.2 R14.2 | length 5
  Top Layer w0.254: Q4.1 13.84,42.667 R10.2
NetQ5_1: Q5.1 R41.2 R43.1 | length 10.5
  Top Layer w0.254: R43.1@46.736,34.536 45.585,34.536 44.577,33.528 44.069,33.528 43.307,32.766 43.307,30.226 43.749,29.784 Q5.1 44.864,29.964 R41.2
NetQ6_1: Q6.1 R48.1 R51.1 | length 5.2
  Top Layer w0.254: R51.1 R48.1 39.878,36.068 40.195,36.386 40.198,36.383 Q6.1
NetQ6_3: Q6.3 R43.2 | length 2.4
  Top Layer w0.254: Q6.3 45.466,35.433 46.109,36.076 R43.2
NetR17_2: R17.2 R23.1 U4.1 | length 11.1
  Top Layer w0.254: R23.1 44.95,69.461 45.085,69.596 45.085,70.739 45.347,71.001 R17.2 46.228,72.771 47.184,73.727 U4.1
NetR20_1: R20.1 U3.8 | length 4
  Top Layer w0.254: U3.8 32.452,23.689 33.147,24.384 R20.1
NetR21_1: R21.1 U3.7 | length 9.8
  Top Layer w0.254: R21.1 24.13,24.257 25.146,25.273 28.956,25.273 29.337,24.892 U3.7
NetR25_1: R25.1 U3.6 | length 6.6
  Top Layer w0.254: U3.6 28.067,22.479 29.075,21.471 R25.1
NetR31_2: R31.2 R33.1 U4.7 | length 12.7
  Top Layer w0.254: R33.1 44.696,83.447 45.085,83.058 45.085,82.042 45.22,81.907 R31.2 46.228,81.026 46.809,80.445 52.651,80.445 52.959,80.137 U4.7
NetR42_2: R42.2 U5.2 | length 7.3
  Top Layer w0.254: U5.2 61.595,18.034 63.119,19.558 R42.2
NetR46_2: R46.2 U5.3 | length 1.9
  Top Layer w0.254: U5.3 60.96,17.119 R46.2
NetR49_2: R49.2 R50.2 U7.6 | length 11.3
  Top Layer w0.254: R49.2 R50.2 12.192,71.755 13.04,72.603 U7.6
NetR53_2: R53.2 U6.2 | length 2.8
  Top Layer w0.254: R53.2 U6.2
NetR54_1: R54.1 U7.3 | length 2.5
  Top Layer w0.254: U7.3 18.176,69.708 18.55,69.334 R54.1
NetR54_2: R54.2 U7.2 | length 2.5
  Top Layer w0.254: R54.2 17.01,69.334 17.526,69.85 U7.2
NetR55_1: R55.1 U7.5 | length 2.1
  Top Layer w0.254: U7.5 R55.1
NetR56_2: R56.2 U6.3 | length 8.7
  Top Layer w0.254: R56.2 25.146,79.883 25.654,79.375 26.289,79.375 26.797,78.867 26.797,75.311 26.203,74.717 U6.3
NetU5_5: U5.5 U5.6 | length 0.6
  Top Layer w0.254: U5.5 U5.6
NetU6_5: U6.5 U6.6 | length 0.6
  Top Layer w0.254: U6.6 U6.5
OSC_IN: R59.2 U1.45 Y1.1 | length 6.8
  Top Layer w0.254: R59.2 23.741,52.062 23.311,51.632 Y1.1 23.311,49.213 24.277,48.247 U1.45
OSC_OUT: R59.1 U1.44 Y1.2 | length 6.8
  Top Layer w0.254: U1.44 24.777,48.272 25.711,49.206 Y1.2 25.711,51.632 25.281,52.062 R59.1
PUL1: C42.2 P1.9 R35.1 R37.1 | length 115.1
  Top Layer w0.254: v2(10.16,9.271) 10.16,9.779 10.194,9.813 R35.1 10.194,14.004 10.668,14.478 R37.1@11.556,14.478 ; v2(36.576,9.271) 77.224,9.271 78.105,8.39 C42.2@78.867,8.39 ; C42.2 79.748,8.263 v2(80.264,7.747)
  Bottom Layer w0.254: v2(10.16,9.271) 10.202,9.229 36.534,9.229 v2(36.576,9.271) ; v2(80.264,7.747) 81.715,6.296 98.044,6.296 99.241,7.493 99.241,21.629 P1.9
PUL1_SEN: C24.1 R37.2 R39.2 U1.26 | length 43.2
  Top Layer w0.254: R39.2 13.216,14.598 R37.2@13.336,14.478 ; R39.2@13.276,17.078 13.216,17.138 C24.1 14.859,19.05 16.556,20.747 16.556,25.961 22.472,31.877 v2(22.86,31.877) ; U1.26 31.714,40.676 32.766,39.624 v2(32.766,33.02)
  Bottom Layer w0.254: v2(22.86,31.877) 24.638,31.877 25.823,33.062 32.724,33.062 v2(32.766,33.02)
PUL2: C43.1 P1.10 R36.1 R38.1 | length 109.8
  Top Layer w0.254: R38.1@18.67,14.478 19.558,14.478 19.812,14.224 19.812,11.718 R36.1 19.778,8.289 v2(19.812,8.255) ; v2(35.56,8.255) 75.938,8.255 C43.1 77.208,8.263 v2(77.216,8.255)
  Bottom Layer w0.254: v2(19.812,8.255) v2(35.56,8.255) ; v2(77.216,8.255) 79.629,5.842 98.425,5.842 99.695,7.112 99.695,23.735 P1.10
PUL2_SEN: C25.1 R38.2 R40.2 U1.25 | length 38.8
  Top Layer w0.254: R38.2 R40.2 17.01,25.773 22.352,31.115 v2(23.495,31.115) ; U1.25 31.198,40.176 32.004,39.37 v2(32.004,32.385)
  Bottom Layer w0.254: v2(23.495,31.115) 24.638,31.115 25.908,32.385 v2(32.004,32.385)
RELAY_L_1B: D4.1 Q1.3 RLY1.2 | length 114.3
  Top Layer w0.254: Q1.3 5.662,58.165 5.026,58.801 5.026,88.338 16.818,100.13 70.304,100.13 70.612,99.822 70.612,98.933 71.181,98.364 D4.1 71.862,95.905 ; RLY1.2 71.862,91.048 71.862,95.905 ; 72.009,95.758 71.862,95.905
RELAY_L_2B: D4.2 Q2.3 RLY1.7 | length 127.6
  Top Layer w0.254: Q2.3 5.462,53.339 4.572,54.229 4.572,88.526 16.63,100.584 70.612,100.584 70.932,100.264 D4.2 72.583,100.264 74.168,98.679 74.168,88.138 71.856,85.826 RLY1.7
RELAY_L_C1: R7.1 U1.6 | length 20.2
  Top Layer w0.254: R7.1 14.851,58.809 16.079,57.581 16.079,49.214 16.91,48.382 16.91,46.386 20.12,43.176 U1.6
RELAY_L_C2: R8.1 U1.7 | length 15.8
  Top Layer w0.254: R8.1 14.601,53.983 15.625,52.959 15.625,49.026 16.456,48.194 16.456,46.198 19.978,42.676 U1.7
RELAY_L_SENSE_C1: C11.1 R15.2 R18.2 U1.21 | length 28.4
  Top Layer w0.254: R15.2 R18.2 C11.1 14.343,37.727 14.732,37.338 14.732,33.493 15.063,33.162 15.063,32.181 15.621,31.623 18.923,31.623 22.225,34.925 v2(22.86,34.925) ; v2(26.67,35.687) 26.777,35.794 U1.21
  Bottom Layer w0.254: v2(22.86,34.925) 24.624,34.925 25.151,35.452 26.435,35.452 v2(26.67,35.687)
RELAY_L_SENSE_C2: C18.1 R27.2 R29.2 U1.22 | length 30
  Top Layer w0.254: R27.2 R29.2 C18.1 14.097,33.155 14.609,32.643 14.605,32.639 14.605,29.591 15.367,28.829 17.017,28.829 22.225,34.037 22.225,34.078 23.41,34.078 v2(23.495,34.163) ; U1.22 27.277,36.155 v2(28.211,35.221)
  Bottom Layer w0.254: v2(23.495,34.163) 24.504,34.163 25.339,34.998 27.988,34.998 v2(28.211,35.221)
RELAY_R_1B: D5.2 Q3.3 RLY2.2 | length 163.2
  Top Layer w0.254: Q3.3 4.897,48.443 4.118,49.222 4.118,88.714 16.442,101.038 72.698,101.038 74.622,99.114 74.622,78.794 74.676,78.74 74.676,73.406 72.462,71.192 RLY2.2 72.624,68.608 72.624,63.52 74.402,61.742 D5.2
RELAY_R_2B: D5.1 Q4.3 RLY2.7 | length 180.4
  Top Layer w0.254: Q4.3 4.897,43.617 3.61,44.904 3.61,88.848 16.254,101.492 73.26,101.492 75.13,99.622 75.13,61.268 75.819,60.579 75.819,58.039 75.504,57.724 D5.1 73.721,57.724 73.025,58.42 73.025,61.568 71.792,62.801 71.792,66.04 RLY2.7
RELAY_R_C1: R9.1 U1.8 | length 11.7
  Top Layer w0.254: R9.1 14.978,49.03 16.002,48.006 16.002,46.009 19.05,42.961 19.05,42.94 19.814,42.176 U1.8
RELAY_R_C2: R10.1 U1.9 | length 8.7
  Top Layer w0.254: R10.1 17.165,44.204 18.199,43.17 18.199,43.149 19.672,41.676 U1.9
RELAY_R_SENSE_C1: C12.1 R16.2 R19.2 U1.23 | length 29.1
  Top Layer w0.254: R16.2 R19.2 C12.1 17.28,28.329 22.352,33.401 v2(22.86,33.401) ; U1.23 27.777,37.12 28.448,36.449 28.448,35.941 v2(29.845,34.544)
  Bottom Layer w0.254: v2(22.86,33.401) 24.384,33.401 25.527,34.544 v2(29.845,34.544)
RELAY_R_SENSE_C2: C19.1 R28.2 R30.2 U1.24 | length 35.5
  Top Layer w0.254: R28.2 R30.2 C19.1 15.248,23.503 16.002,24.257 16.002,26.162 22.479,32.639 v2(23.495,32.639) ; U1.24 30.339,38.876 31.115,38.1 v2(31.115,33.782)
  Bottom Layer w0.254: v2(23.495,32.639) 24.638,32.639 25.781,33.782 v2(31.115,33.782)
RESET: P3.4 R6.1 U1.46 | length 23.1
  Top Layer w0.254: R6.1 22.733,49.149 23.777,48.105 U1.46 23.777,45.621 v2(23.749,45.593)
  Bottom Layer w0.254: v2(23.749,45.593) 38.227,45.593 38.862,46.228 P3.4
RX0: P4.2 U1.13 | length 8.2
  Top Layer w0.254: P4.2 20.828,35.433 22.777,37.382 U1.13
TX0: P4.3 U1.14 | length 10.1
  Top Layer w0.254: P4.3 19.431,32.893 23.277,36.739 U1.14
VBAT: D1.1 D2.1 D3.2 P1.3 P1.4 RLY1.3 RLY1.8 RLY2.3 RLY2.8 U5.4 | length 1.7
  Top Layer w0.254: U5.4 60.945,13.477 60.96,13.462
VBAT_SEN: C26.1 R45.2 R46.1 U1.33 | length 58.9
  Top Layer w0.254: U1.33 32.004,44.176 32.512,44.684 32.512,46.101 33.02,46.609 C26.1 33.901,47.871 36.576,50.546 41.021,50.546 48.133,43.434 54.991,43.434 58.42,40.005 58.42,24.511 59.19,23.741 R45.2 R46.1
VBAT_SEN_EN: R42.1 U1.28 | length 46.6
  Top Layer w0.254: U1.28 36.175,41.676 37.465,40.386 37.465,38.354 38.481,37.338 v2(46.863,37.338) ; v2(59.69,37.338) 59.69,33.782 60.144,33.328 60.144,30.407 63.119,27.432 R42.1
  Bottom Layer w0.254: v2(46.863,37.338) v2(59.69,37.338)
VCAP: C3.1 U1.10 | length 4.6
  Top Layer w0.254: C3.1 18.161,42.545 19.53,41.176 U1.10
VHALL: C29.1 P1.5 R44.2 | length 64.1
  Top Layer w0.8: R44.2@42.164,17.726 R44.2 42.164,12.065 44.196,10.033 79.375,10.033 81.145,8.263 C29.1 94.877,8.263 96.5,9.886 P1.5
VHALL_SEN: C30.1 R47.1 R52.2 U1.32 | length 26.4
  Top Layer w0.254: U1.32 32.146,43.676 33.047,44.577 C30.1 33.901,43.442 v2(33.909,43.434) ; v2(33.909,37.338) 33.909,32.893 37.584,29.218 R47.1 R52.2
  Bottom Layer w0.254: v2(33.909,37.338) v2(33.909,43.434)
VHALL_SEN_EN: R48.2 U1.27 | length 12.3
  Top Layer w0.254: U1.27 34.897,41.176 35.814,40.259 35.814,36.576 36.322,36.068 R48.2
VPUL: C28.1 C44.1 Q5.3 R35.2 R36.2 R44.1 R47.2 U4.8 | length 140.9
  Top Layer w0.8: R35.2 v3(15.113,11.684) R36.2 ; v3(37.465,22.225) 37.519,22.279 R44.1 42.156,22.287 R44.1@42.156,22.668 ; R47.2 C28.1 ; Q5.3 42.184,26.444 C28.1 ; R44.1@42.418,22.406 R44.1@42.156,22.668 ; R44.1@42.156,22.668 C28.1
  Bottom Layer w0.8: v3(15.113,11.684) 15.113,22.225 ; v3(37.465,22.225) 15.113,22.225 ; v3(48.006,79.121) 18.542,79.121 15.113,75.692 15.113,22.225
VRLY: D1.2 D4.3 D5.3 R57.1 RLY1.1 RLY1.6 RLY2.1 RLY2.6 U6.4 U7.4 | length 122.5
  Top Layer w0.8: R57.1@20.828,73.186 22.132,73.186 22.606,73.66 22.606,96.266 24.833,98.493 D1.2 68.258,98.493 68.326,98.561 ; D4.3 69.079,99.314 68.326,98.561 ; RLY2.6 68.453,62.992 68.326,63.119 ; RLY2.1 68.372,75.992 68.326,75.946 ; RLY1.6 68.326,81.026 ; RLY1.1 68.372,94.026 68.326,93.98 ; D5.3 69.215,58.674 68.326,59.563 68.326,63.119 ; 68.326,63.119 68.326,75.946 ; 68.326,75.946 68.326,81.026 ; 68.326,81.026 68.326,93.98 ; 68.326,93.98 68.326,98.561
VSUP: C1.1 C2.2 D2.2 Q5.2 R41.1 U2.2 | length 23.1
  Top Layer w0.5: 50.586,32.766 50.84,32.512
  Top Layer w1.2: Q5.2@44.744,31.624 50.546,31.624 C2.2@50.586,31.664 ; D2.2@50.546,17.272 50.546,24.09 50.586,24.13 C2.2@50.586,31.664 ; U2.2@50.586,33.996 50.586,32.766 C2.2@50.586,31.664 ; C2.2@50.672,31.75 C2.2@50.586,31.664
pads on no net: D6.3 D7.3 MP1.MARK MP2.MARK MP3.MARK P1.6 P1.11 P1.12 P1.13 P2.6 P2.8 P2.9 P2.10 P2.11 P2.12 P2.13 P2.14 U1.1 U1.2 U1.3 U1.15 U1.16 U1.20 U1.36 U1.37 U1.38 U1.39 U1.41 U1.42 U1.43 U1.48 U3.5

## Polygon pours and split planes (outlines as drawn)
GND on Bottom Layer "Top Layer-No Net2" (solid, remove dead copper, pour order 8): 0,3 0,103.5 4.5,103.5 4.5,106.5 101.6,106.5 101.6,0 4.5,0 4.5,3
VBAT on Bottom Layer "Top Layer-No Net" (solid, pour order 2): 73.66,100.33 53.848,100.33 51.562,100.33 48.768,97.536 48.768,75.692 48.768,46.228 50.8,44.196 51.562,43.434 56.134,43.434 57.658,43.434 60.198,40.894 60.96,40.132 60.96,35.56 60.96,33.782 62.992,31.75 65.532,29.21 65.532,22.352 65.532,16.51 68.326,13.716 71.882,10.16 94.996,10.16 94.996,29.464 90.17,29.464 90.17,55.626 87.122,58.674 77.216,58.674 73.66,62.23
GND on Top Layer "Top Layer-No Net1" (solid, remove dead copper, pour order 6): 0,2.999 0,103.48 4.498,103.48 4.498,106.48 101.558,106.48 101.558,0 4.498,0 4.498,2.999

## Keep-outs
Keep-Out Layer:
  lines w0.254: 1.392,103.5 0,103.5 ; 0,103.5 4.5,103.5 4.5,106.5 101.6,106.5 101.6,0 4.5,0 4.5,3 0,3 0,103.5

## Other copper
Top Layer:
  rectangle net GND: 82.169,27.051 87.376,58.039
  rectangle net VBAT: 56.515,92.456 67.691,96.393
  rectangle net VRLY: 18.034,71.882 21.844,73.66
  rectangle net NetC5_2: 82.804,67.564 88.646,71.374
  rectangle net NetC4_2: 82.804,85.598 89.154,89.408
  region net VRLY: 22.809,78.562 25.984,78.562 25.984,76.149 25.095,76.149 25.095,77.546 22.809,77.546
  region net GND: 56.261,77.597 56.261,72.771 54.864,72.771 54.864,75.057 42.164,75.057 42.164,77.597
  region net GND: 55.88,96.52 31.369,96.52 29.337,94.488 29.337,58.547 32.639,55.245 32.639,54.102 35.56,51.181 40.894,51.181 48.26,43.815 55.118,43.815 60.579,38.354 60.579,30.607 86.614,30.607 86.614,57.023 69.723,57.023 67.691,59.055 56.769,59.055 55.88,59.944 55.88,66.675 54.229,68.326 54.229,69.85 47.879,69.85 47.879,68.199 46.355,66.675 43.18,66.675 42.545,67.31 42.545,85.09 43.18,85.725 46.609,85.725 47.752,84.582 47.752,82.931 53.975,82.931 53.975,84.201 55.88,86.106
  region net KT_R_H: 67.691,74.168 56.515,74.168 56.515,59.69 67.691,59.69 67.691,66.04 64.262,66.04 64.262,69.469 67.691,69.469
  region net KT_L_H: 67.691,92.202 56.515,92.202 56.515,77.851 67.691,77.851 67.691,84.074 64.262,84.074 64.262,87.63 67.691,87.63
  region net VPUL: 47.498,80.01 47.498,77.978 52.324,77.978 52.324,80.01
  region net VBAT: 49.276,14.351 49.276,11.303 89.535,11.303 89.535,10.16 94.996,10.16 94.996,19.685 89.535,19.685 89.535,14.351
  region net MOTOR_L_C1: 95.25,97.79 95.25,91.948 88.9,91.948 88.9,89.916 82.55,89.916 82.55,88.138 76.2,88.138 76.2,97.79
  region net MOTOR_R_C1: 76.2,78.74 95.25,78.74 95.25,73.025 94.615,72.39 94.615,70.104 88.9,70.104 88.9,71.882 82.55,71.882 82.55,70.866 76.2,70.866
  region net MOTOR_R_C2: 76.2,61.214 95.25,61.214 95.25,69.596 88.9,69.596 88.9,67.31 82.55,67.31 82.55,70.612 76.2,70.612
  region net MOTOR_L_C2: 76.2,87.63 76.2,79.248 95.25,79.248 95.25,91.44 89.408,91.44 89.408,85.344 82.55,85.344 82.55,87.63
Bottom Layer:
  region net MOTOR_L_C2: 76.2,87.63 76.2,79.248 95.25,79.248 95.25,91.44 89.408,91.44 89.408,87.63
  region net MOTOR_L_C1: 95.25,97.79 95.25,91.948 88.9,91.948 88.9,88.138 76.2,88.138 76.2,97.79
  region net MOTOR_R_C1: 76.2,77.724 95.25,77.724 95.25,70.104 76.2,70.104
  region net MOTOR_R_C2: 76.2,69.85 95.25,69.85 95.25,61.214 76.2,61.214
  text "PAN_V1.2" at 2.286,5.08 h1.52 r270

## Dimensions
4.5,106.5 to 4.5,0 on Top Overlay
101.6,106.5 to 0,103.5 on Top Overlay